# EAGLE board Qwiic LED Stick-Panel (EAGLE 9.0.1)
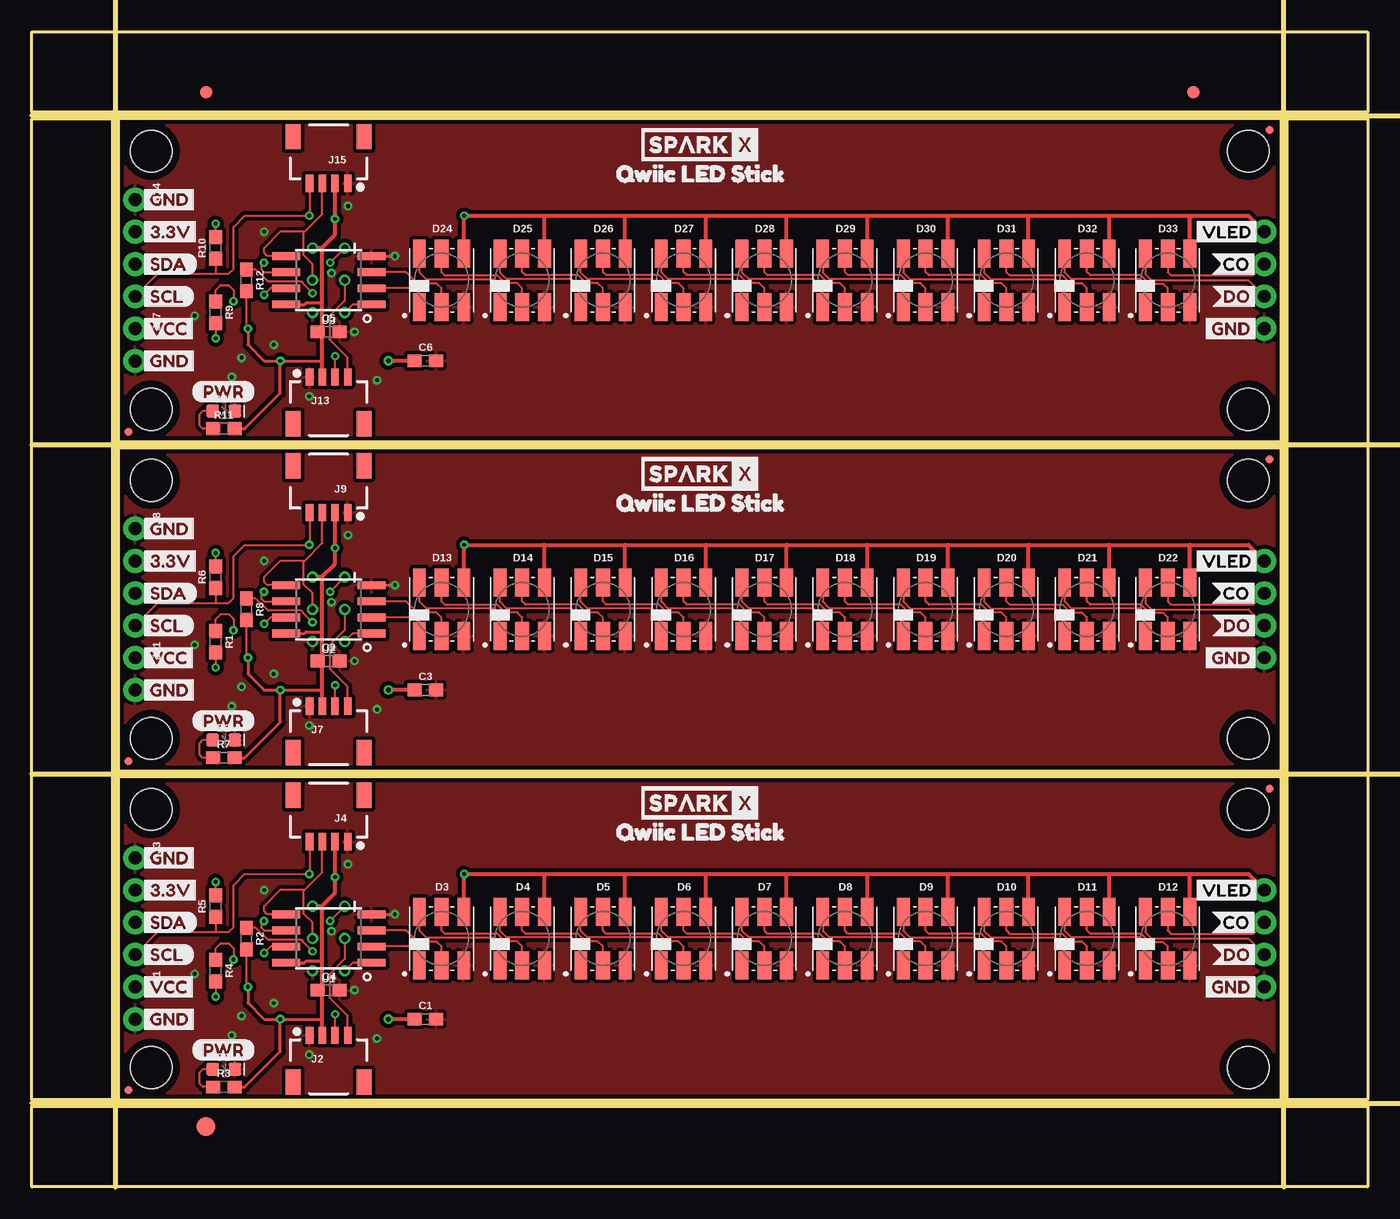
[diagram p0: board, top side]
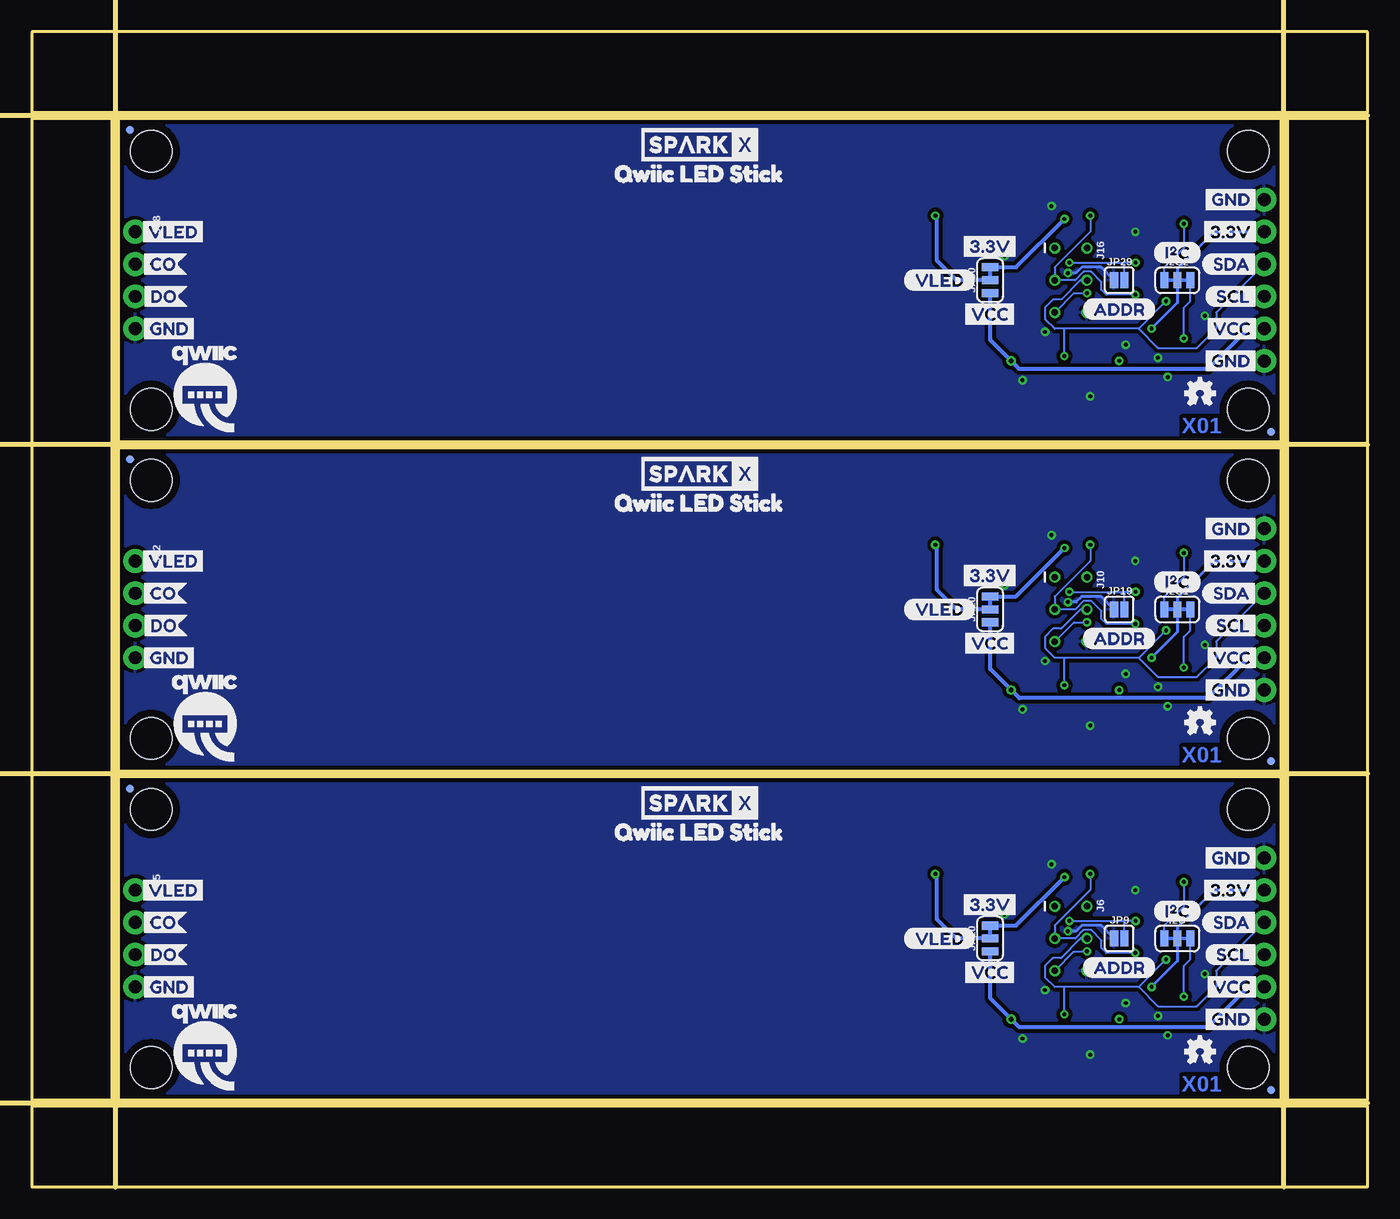
[diagram p1: board, bottom side, seen from below]

Size 105.16 x 90.93 mm. Coordinates in mm from the lower left corner, seen from the top.
Outline: 98.3,6.86 6.86,6.86 6.86,32.26 98.3,32.26 98.3,6.86
Outline: 98.3,32.77 6.86,32.77 6.86,58.17 98.3,58.17 98.3,32.77
Outline: 98.3,58.67 6.86,58.67 6.86,84.07 98.3,84.07 98.3,58.67
Outline: 0,6.35 105.16,6.35 105.16,0 0,0 0,6.35
Outline: 98.81,84.07 105.16,84.07 105.16,6.86 98.81,6.86 98.81,84.07
Outline: 0,90.93 105.16,90.93 105.16,84.58 0,84.58 0,90.93
Outline: 0,84.07 6.35,84.07 6.35,6.86 0,6.86 0,84.07
Copper layers (1*16): Top 0.035mm / dielectric 1.5mm / Bottom 0.035mm
Design rules "SparkFun-2-layer-PCBWay-LIMIT": minimum track width 6mil, minimum drill 0.3mm, track to track 6mil, track to pad 6mil, pad to pad 6mil, via to via 6mil, smd to smd 6mil, copper to edge 6mil, drill to drill 6mil, minimum pad ring 7mil, minimum via ring 7mil, stop-mask expansion 4mil, vias tented up to drill 25mil, thermal gap 10mil
Milling: 6 lines

## Footprints (pad centres in the part's own frame; a part is rotated, then mirrored left to right if it is on the bottom)
0603 = smd 1.1 x 1: 1 -0.85,0; 2 0.85,0
LED-0603 = smd 1 x 1: A -0.877,0; C 0.877,0
APA102-5050 = smd 1 x 2.2: P1 -1.75,-2.1; P3 1.75,-2.1; P4 1.75,2.1; P6 -1.75,2.1 | smd 1.1 x 2.2: P2 0,-2.1; P5 0,2.1
FIDUCIAL-1X2 = smd 1 x 1: 1 0,0
FIDUCIAL-1.5X3 = smd 1.5 x 1.5: 1 0,0
SMT-JUMPER_3_2-NC_TRACE_SILK = smd 0.635 x 1.27: 1 -1.016,0; 2 0,0; 3 1.016,0
1X02_NO_SILK = drill 1.016 pad 1.88: 1 0,0; 2 2.54,0
1X04_1MM_RA = smd 0.6 x 1.35: 1 -1.5,0; 2 -0.5,0; 3 0.5,0; 4 1.5,0 | smd 1.2 x 2: NC1 2.8,-3.675; NC2 -2.8,-3.675
1X04_NO_SILK = drill 1.016 pad 1.88: 1 0,0; 2 2.54,0; 3 5.08,0; 4 7.62,0
2X3_TEST_POINTS = drill 0.508: 1 -2.54,-1.27; 2 -2.54,1.27; 3 0,-1.27; 4 0,1.27; 5 2.54,-1.27; 6 2.54,1.27
MICRO-FIDUCIAL = smd 0.635 x 0.635: 1 0,0
STAND-OFF = hole 3.302: 0,0
SMT-JUMPER_2_NO_SILK = smd 0.635 x 1.27: 1 -0.406,0; 2 0.406,0
SMT-JUMPER_3_1-NC_TRACE_SILK = smd 0.635 x 1.27: 1 -1.016,0; 2 0,0; 3 1.016,0
SO08-EIAJ_MCU = smd 0.61 x 2.21: 1 -1.905,-3.378; 2 -0.635,-3.378; 3 0.635,-3.378; 4 1.905,-3.378; 5 1.905,3.353; 6 0.635,3.353; 7 -0.635,3.353; 8 -1.905,3.353

## Placement (x,y rotation side)
C1  4.7uF  [0603]  30.99,13.21 0 top
C2  0.1uF  [0603]  23.37,41.4 0 top
C3  4.7uF  [0603]  30.99,39.12 0 top
C4  0.1uF  [0603]  23.37,15.49 0 top
C5  0.1uF  [0603]  23.37,67.31 0 top
C6  4.7uF  [0603]  30.99,65.02 0 top
D1  RED  [LED-0603]  15.11,9.27 0 top
D2  RED  [LED-0603]  15.11,35.18 0 top
D3  APA1025050  [APA102-5050]  32.26,19.56 0 top
D4  APA1025050  [APA102-5050]  38.61,19.56 0 top
D5  APA1025050  [APA102-5050]  44.96,19.56 0 top
D6  APA1025050  [APA102-5050]  51.31,19.56 0 top
D7  APA1025050  [APA102-5050]  57.66,19.56 0 top
D8  APA1025050  [APA102-5050]  64.01,19.56 0 top
D9  APA1025050  [APA102-5050]  70.36,19.56 0 top
D10  APA1025050  [APA102-5050]  76.71,19.56 0 top
D11  APA1025050  [APA102-5050]  83.06,19.56 0 top
D12  APA1025050  [APA102-5050]  89.41,19.56 0 top
D13  APA1025050  [APA102-5050]  32.26,45.47 0 top
D14  APA1025050  [APA102-5050]  38.61,45.47 0 top
D15  APA1025050  [APA102-5050]  44.96,45.47 0 top
D16  APA1025050  [APA102-5050]  51.31,45.47 0 top
D17  APA1025050  [APA102-5050]  57.66,45.47 0 top
D18  APA1025050  [APA102-5050]  64.01,45.47 0 top
D19  APA1025050  [APA102-5050]  70.36,45.47 0 top
D20  APA1025050  [APA102-5050]  76.71,45.47 0 top
D21  APA1025050  [APA102-5050]  83.06,45.47 0 top
D22  APA1025050  [APA102-5050]  89.41,45.47 0 top
D23  RED  [LED-0603]  15.11,61.09 0 top
D24  APA1025050  [APA102-5050]  32.26,71.37 0 top
D25  APA1025050  [APA102-5050]  38.61,71.37 0 top
D26  APA1025050  [APA102-5050]  44.96,71.37 0 top
D27  APA1025050  [APA102-5050]  51.31,71.37 0 top
D28  APA1025050  [APA102-5050]  57.66,71.37 0 top
D29  APA1025050  [APA102-5050]  64.01,71.37 0 top
D30  APA1025050  [APA102-5050]  70.36,71.37 0 top
D31  APA1025050  [APA102-5050]  76.71,71.37 0 top
D32  APA1025050  [APA102-5050]  83.06,71.37 0 top
D33  APA1025050  [APA102-5050]  89.41,71.37 0 top
E$1  [FIDUCIAL-1X2]  13.72,86.17 0 top
E$2  [FIDUCIAL-1X2]  91.44,86.17 0 top
E$3  [FIDUCIAL-1.5X3]  13.72,4.76 0 top
I2C  [SMT-JUMPER_3_2-NC_TRACE_SILK]  14.99,19.56 0 bottom
I2C1  [SMT-JUMPER_3_2-NC_TRACE_SILK]  14.99,45.47 0 bottom
I2C2  [SMT-JUMPER_3_2-NC_TRACE_SILK]  14.99,71.37 0 bottom
J1  [1X02_NO_SILK]  8.13,15.75 270 top
J2  SMD  [1X04_1MM_RA]  23.37,11.94 0 top
J3  PTH  [1X04_NO_SILK]  8.13,25.91 270 top
J4  SMD  [1X04_1MM_RA]  23.37,27.18 180 top
J5  [1X04_NO_SILK]  97.03,23.37 270 bottom
J6  AVR_SPI_PROG_3X2TESTPOINTS  [2X3_TEST_POINTS]  23.37,19.56 270 bottom
J7  SMD  [1X04_1MM_RA]  23.37,37.85 0 top
J8  PTH  [1X04_NO_SILK]  8.13,51.82 270 top
J9  SMD  [1X04_1MM_RA]  23.37,53.09 180 top
J10  AVR_SPI_PROG_3X2TESTPOINTS  [2X3_TEST_POINTS]  23.37,45.47 270 bottom
J11  [1X02_NO_SILK]  8.13,41.66 270 top
J12  [1X04_NO_SILK]  97.03,49.28 270 bottom
J13  SMD  [1X04_1MM_RA]  23.37,63.75 0 top
J14  PTH  [1X04_NO_SILK]  8.13,77.72 270 top
J15  SMD  [1X04_1MM_RA]  23.37,78.99 180 top
J16  AVR_SPI_PROG_3X2TESTPOINTS  [2X3_TEST_POINTS]  23.37,71.37 270 bottom
J17  [1X02_NO_SILK]  8.13,67.56 270 top
J18  [1X04_NO_SILK]  97.03,75.18 270 bottom
JP1  FIDUCIALUFIDUCIAL  [MICRO-FIDUCIAL]  7.62,7.62 270 bottom
JP2  FIDUCIALUFIDUCIAL  [MICRO-FIDUCIAL]  97.41,31.37 90 top
JP3  STAND-OFF  [STAND-OFF]  9.4,9.4 90 top
JP4  STAND-OFF  [STAND-OFF]  9.4,29.72 90 top
JP5  FIDUCIALUFIDUCIAL  [MICRO-FIDUCIAL]  97.41,31.37 270 bottom
JP6  FIDUCIALUFIDUCIAL  [MICRO-FIDUCIAL]  7.62,7.62 90 top
JP7  STAND-OFF  [STAND-OFF]  95.76,29.72 0 top
JP8  STAND-OFF  [STAND-OFF]  95.76,9.4 0 top
JP9  JUMPER-SMT_2_NO_SILK  [SMT-JUMPER_2_NO_SILK]  19.56,19.56 0 bottom
JP10  [SMT-JUMPER_3_1-NC_TRACE_SILK]  29.72,19.56 90 bottom
JP11  STAND-OFF  [STAND-OFF]  9.4,35.31 90 top
JP12  STAND-OFF  [STAND-OFF]  9.4,55.63 90 top
JP13  FIDUCIALUFIDUCIAL  [MICRO-FIDUCIAL]  97.41,57.28 90 top
JP14  FIDUCIALUFIDUCIAL  [MICRO-FIDUCIAL]  7.62,33.53 90 top
JP15  FIDUCIALUFIDUCIAL  [MICRO-FIDUCIAL]  7.62,33.53 270 bottom
JP16  FIDUCIALUFIDUCIAL  [MICRO-FIDUCIAL]  97.41,57.28 270 bottom
JP17  STAND-OFF  [STAND-OFF]  95.76,55.63 0 top
JP18  STAND-OFF  [STAND-OFF]  95.76,35.31 0 top
JP19  JUMPER-SMT_2_NO_SILK  [SMT-JUMPER_2_NO_SILK]  19.56,45.47 0 bottom
JP20  [SMT-JUMPER_3_1-NC_TRACE_SILK]  29.72,45.47 90 bottom
JP21  STAND-OFF  [STAND-OFF]  9.4,61.21 90 top
JP22  STAND-OFF  [STAND-OFF]  9.4,81.53 90 top
JP23  FIDUCIALUFIDUCIAL  [MICRO-FIDUCIAL]  97.41,83.19 90 top
JP24  FIDUCIALUFIDUCIAL  [MICRO-FIDUCIAL]  7.62,59.44 90 top
JP25  FIDUCIALUFIDUCIAL  [MICRO-FIDUCIAL]  7.62,59.44 270 bottom
JP26  FIDUCIALUFIDUCIAL  [MICRO-FIDUCIAL]  97.41,83.19 270 bottom
JP27  STAND-OFF  [STAND-OFF]  95.76,81.53 0 top
JP28  STAND-OFF  [STAND-OFF]  95.76,61.21 0 top
JP29  JUMPER-SMT_2_NO_SILK  [SMT-JUMPER_2_NO_SILK]  19.56,71.37 0 bottom
JP30  [SMT-JUMPER_3_1-NC_TRACE_SILK]  29.72,71.37 90 bottom
LOGO1  OSHW-LOGOMINI  [OSHW-LOGO-MINI]  13.21,10.67 0 bottom
LOGO2  OSHW-LOGOMINI  [OSHW-LOGO-MINI]  13.21,36.58 0 bottom
LOGO3  OSHW-LOGOMINI  [OSHW-LOGO-MINI]  13.21,62.48 0 bottom
R1  2.2k  [0603]  14.48,42.93 270 top
R2  4.7k  [0603]  16.89,19.56 270 top
R3  1k  [0603]  15.11,7.87 0 top
R4  2.2k  [0603]  14.48,17.02 270 top
R5  2.2k  [0603]  14.48,22.1 90 top
R6  2.2k  [0603]  14.48,48.01 90 top
R7  1k  [0603]  15.11,33.78 0 top
R8  4.7k  [0603]  16.89,45.47 270 top
R9  2.2k  [0603]  14.48,68.83 270 top
R10  2.2k  [0603]  14.48,73.91 90 top
R11  1k  [0603]  15.11,59.69 0 top
R12  4.7k  [0603]  16.89,71.37 270 top
U1  Tiny85-20-SMT  [SO08-EIAJ_MCU]  23.37,19.56 90 top
U2  Tiny85-20-SMT  [SO08-EIAJ_MCU]  23.37,45.47 90 top
U3  Tiny85-20-SMT  [SO08-EIAJ_MCU]  23.37,71.37 90 top
U$1  SPARKX-LOGO4  [SPARKX-MEDIUM]  52.58,30.23 0 top
U$2  SPARKX-LOGO4  [SPARKX-MEDIUM]  52.58,30.23 0 bottom
U$3  [GND1]  13.21,25.91 0 bottom
U$4  [3#3V2]  13.34,23.37 0 bottom
U$5  [VLED4]  96.9,23.37 0 bottom
U$6  [DO8]  96.77,18.29 0 bottom
U$7  [CO5]  96.77,20.83 0 bottom
U$8  [GND1]  96.77,15.75 0 bottom
U$9  [VLED4]  91.19,23.37 0 top
U$10  [(PWR)]  12.57,10.79 0 top
U$11  [(I_SUPER2_C)]  16.89,21.72 0 bottom
U$12  [GND1]  91.95,15.75 0 top
U$13  [QWIIC_LED_STICK1]  60.45,27.94 0 bottom
U$14  SPARKX-LOGO4  [SPARKX-MEDIUM]  52.58,56.13 0 bottom
U$15  [DO12]  92.84,18.29 0 top
U$16  [CO9]  92.84,20.83 0 top
U$17  [SDA0]  13.08,20.83 0 bottom
U$18  [SCL1]  12.83,18.29 0 bottom
U$19  [VCC1]  8.38,15.75 0 top
U$20  [VCC1]  13.08,15.75 0 bottom
U$21  [3#3V2]  8.38,23.37 0 top
U$22  [GND1]  8.38,25.91 0 top
U$23  [GND0]  13.21,13.21 0 bottom
U$24  [GND0]  8.38,13.21 0 top
U$25  [VLED3]  36.58,19.56 0 bottom
U$26  [SCL9]  8.38,18.29 0 top
U$27  [SDA8]  8.38,20.83 0 top
U$28  [ADDR2]  22.48,17.27 0 bottom
U$29  [QWIIC-LOGO-MEDIUM]  91.57,11.05 0 bottom
U$30  [3#3V3]  32.26,22.23 0 bottom
U$31  [VCC1]  32.13,16.89 0 bottom
U$32  [QWIIC_LED_STICK1]  44.83,27.94 0 top
U$33  SPARKX-LOGO4  [SPARKX-MEDIUM]  52.58,56.13 0 top
U$34  [3#3V2]  8.38,49.28 0 top
U$35  [GND1]  8.38,51.82 0 top
U$36  [SCL9]  8.38,44.2 0 top
U$37  [SDA8]  8.38,46.74 0 top
U$38  [GND1]  13.21,51.82 0 bottom
U$39  [3#3V2]  13.34,49.28 0 bottom
U$40  [(PWR)]  12.57,36.7 0 top
U$41  [(I_SUPER2_C)]  16.89,47.62 0 bottom
U$42  [QWIIC-LOGO-MEDIUM]  91.57,36.96 0 bottom
U$43  [VLED4]  91.19,49.28 0 top
U$44  [GND1]  91.95,41.66 0 top
U$45  [DO12]  92.84,44.2 0 top
U$46  [CO9]  92.84,46.74 0 top
U$47  [SDA0]  13.08,46.74 0 bottom
U$48  [SCL1]  12.83,44.2 0 bottom
U$49  [VLED4]  96.9,49.28 0 bottom
U$50  [DO8]  96.77,44.2 0 bottom
U$51  [CO5]  96.77,46.74 0 bottom
U$52  [GND1]  96.77,41.66 0 bottom
U$53  [VCC1]  8.38,41.66 0 top
U$54  [VCC1]  13.08,41.66 0 bottom
U$55  [GND0]  13.21,39.12 0 bottom
U$56  [GND0]  8.38,39.12 0 top
U$57  [VLED3]  36.58,45.47 0 bottom
U$58  [ADDR2]  22.48,43.18 0 bottom
U$59  [3#3V3]  32.26,48.13 0 bottom
U$60  [VCC1]  32.13,42.8 0 bottom
U$61  [QWIIC_LED_STICK1]  44.83,53.85 0 top
U$62  [QWIIC_LED_STICK1]  60.45,53.85 0 bottom
U$63  SPARKX-LOGO4  [SPARKX-MEDIUM]  52.58,82.04 0 bottom
U$64  SPARKX-LOGO4  [SPARKX-MEDIUM]  52.58,82.04 0 top
U$65  [3#3V2]  8.38,75.18 0 top
U$66  [GND1]  8.38,77.72 0 top
U$67  [SCL9]  8.38,70.1 0 top
U$68  [SDA8]  8.38,72.64 0 top
U$69  [GND1]  13.21,77.72 0 bottom
U$70  [3#3V2]  13.34,75.18 0 bottom
U$71  [(PWR)]  12.57,62.61 0 top
U$72  [(I_SUPER2_C)]  16.89,73.53 0 bottom
U$73  [QWIIC-LOGO-MEDIUM]  91.57,62.86 0 bottom
U$74  [VLED4]  91.19,75.18 0 top
U$75  [GND1]  91.95,67.56 0 top
U$76  [DO12]  92.84,70.1 0 top
U$77  [CO9]  92.84,72.64 0 top
U$78  [SDA0]  13.08,72.64 0 bottom
U$79  [SCL1]  12.83,70.1 0 bottom
U$80  [VLED4]  96.9,75.18 0 bottom
U$81  [DO8]  96.77,70.1 0 bottom
U$82  [CO5]  96.77,72.64 0 bottom
U$83  [GND1]  96.77,67.56 0 bottom
U$84  [VCC1]  8.38,67.56 0 top
U$85  [VCC1]  13.08,67.56 0 bottom
U$86  [GND0]  13.21,65.02 0 bottom
U$87  [GND0]  8.38,65.02 0 top
U$88  [VLED3]  36.58,71.37 0 bottom
U$89  [ADDR2]  22.48,69.09 0 bottom
U$90  [3#3V3]  32.26,74.04 0 bottom
U$91  [VCC1]  32.13,68.71 0 bottom
U$92  [QWIIC_LED_STICK1]  44.83,79.76 0 top
U$93  [QWIIC_LED_STICK1]  60.45,79.76 0 bottom

## Library data of the parts
C1 C3 C6 = SparkFun-Capacitors; PROD_ID: CAP-08280
C2 C4 C5 = SparkFun-Capacitors; PROD_ID: CAP-00810
D1 D2 D23 = SparkFun-LED; PROD_ID: DIO-00819
D3-D22 D24-D33 = SparkFun-LED; PROD_ID: DIO-13739
E$1 E$2 LOGO1-LOGO3 = SparkFun-Aesthetics
E$3 = SparkFun-Retired
I2C I2C1 I2C2 JP9 JP10 JP19 JP20 JP29 JP30 = SparkFun-Jumpers
J1 J6 J10 J11 J16 J17 = SparkFun-Connectors
J2-J4 J7-J9 J13-J15 U$1 U$2 U$14 U$33 U$63 U$64 = SparkX
J5 J12 J18 = SparkFun-Connectors; PROD_ID: CONN-09696
JP1-JP8 JP11-JP18 JP21-JP28 = SparkFun
R1 R4-R6 R9 R10 = SparkFun-Resistors; PROD_ID: RES-08272
R2 R8 R12 = SparkFun-Resistors; PROD_ID: RES-07857
R3 R7 R11 = SparkFun-Resistors; PROD_ID: RES-07856
U1-U3 = Qwiic-Bluetooth-HC1x; PROD_ID: IC-09092
U$3 U$4 U$8 U$10-U$12 U$21 U$22 U$26 U$27 U$34-U$41 U$44 U$52 U$65-U$72 U$75 U$83 = Labels-0_04
U$5-U$7 U$9 U$15-U$18 U$25 U$28 U$43 U$45-U$51 U$57 U$58 U$74 U$76-U$82 U$88 U$89 = buzzard_labels (5)
U$13 U$32 U$61 U$62 U$92 U$93 = buzzard_labels (6)
U$19 U$20 U$23 U$24 U$30 U$31 U$53-U$56 U$59 U$60 U$84-U$87 U$90 U$91 = buzzard_power
U$29 U$42 U$73 = Labels

## Nets
3.3V: C4.1 I2C.2 J2.2 J3.2 J4.2 J6.2 JP10.3 R2.2 R3.2 U1.8
3.3V1: C2.1 I2C1.2 J7.2 J8.2 J9.2 J10.2 JP20.3 R7.2 R8.2 U2.8
3.3V2: C5.1 I2C2.2 J13.2 J14.2 J15.2 J16.2 JP30.3 R11.2 R12.2 U3.8
!RST: J6.5 R2.1 U1.1
!RST1: J10.5 R8.1 U2.1
!RST2: J16.5 R12.1 U3.1
ADDR(MISO): J6.1 JP9.2 U1.6
ADDR(MISO)1: J10.1 JP19.2 U2.6
ADDR(MISO)2: J16.1 JP29.2 U3.6
CLK: D3.P2 U1.3
CLK1: D13.P2 U2.3
CLK2: D24.P2 U3.3
CO(10): D12.P5 J5.2
CO(10)1: D22.P5 J12.2
CO(10)2: D33.P5 J18.2
DO: D3.P1 U1.2
DO1: D13.P1 U2.2
DO2: D24.P1 U3.2
DO(10): D12.P6 J5.3
DO(10)1: D22.P6 J12.3
DO(10)2: D33.P6 J18.3
GND: C1.2 C4.2 D1.C D3.P3 D4.P3 D5.P3 D6.P3 D7.P3 D8.P3 D9.P3 D10.P3 D11.P3 D12.P3 J1.2 J2.1 J3.1 J4.1 J5.4 J6.6 JP9.1 U1.4
GND1: C2.2 C3.2 D2.C D13.P3 D14.P3 D15.P3 D16.P3 D17.P3 D18.P3 D19.P3 D20.P3 D21.P3 D22.P3 J7.1 J8.1 J9.1 J10.6 J11.2 J12.4 JP19.1 U2.4
GND2: C5.2 C6.2 D23.C D24.P3 D25.P3 D26.P3 D27.P3 D28.P3 D29.P3 D30.P3 D31.P3 D32.P3 D33.P3 J13.1 J14.1 J15.1 J16.6 J17.2 J18.4 JP29.1 U3.4
N$1: I2C.1 R5.2
N$2: I2C.3 R4.2
N$3: D1.A R3.1
N$4: I2C1.1 R6.2
N$5: I2C1.3 R1.2
N$6: D2.A R7.1
N$7: D21.P6 D22.P1
N$8: D11.P6 D12.P1
N$9: D11.P5 D12.P2
N$10: D10.P5 D11.P2
N$11: D10.P6 D11.P1
N$12: D9.P5 D10.P2
N$13: D9.P6 D10.P1
N$14: D8.P5 D9.P2
N$15: D8.P6 D9.P1
N$16: D7.P5 D8.P2
N$17: D7.P6 D8.P1
N$18: D6.P5 D7.P2
N$19: D6.P6 D7.P1
N$20: D5.P6 D6.P1
N$21: D5.P5 D6.P2
N$22: D4.P6 D5.P1
N$23: D4.P5 D5.P2
N$24: D3.P5 D4.P2
N$25: D3.P6 D4.P1
N$26: D21.P5 D22.P2
N$27: D20.P5 D21.P2
N$28: D20.P6 D21.P1
N$29: D19.P5 D20.P2
N$30: D19.P6 D20.P1
N$31: D18.P5 D19.P2
N$32: D18.P6 D19.P1
N$33: D17.P5 D18.P2
N$34: D17.P6 D18.P1
N$35: D16.P5 D17.P2
N$36: D16.P6 D17.P1
N$37: D15.P6 D16.P1
N$38: D15.P5 D16.P2
N$39: D14.P6 D15.P1
N$40: D14.P5 D15.P2
N$41: D13.P5 D14.P2
N$42: D13.P6 D14.P1
N$43: I2C2.1 R10.2
N$44: I2C2.3 R9.2
N$45: D23.A R11.1
N$46: D32.P6 D33.P1
N$47: D32.P5 D33.P2
N$48: D31.P5 D32.P2
N$49: D31.P6 D32.P1
N$50: D30.P5 D31.P2
N$51: D30.P6 D31.P1
N$52: D29.P5 D30.P2
N$53: D29.P6 D30.P1
N$54: D28.P5 D29.P2
N$55: D28.P6 D29.P1
N$56: D27.P5 D28.P2
N$57: D27.P6 D28.P1
N$58: D26.P6 D27.P1
N$59: D26.P5 D27.P2
N$60: D25.P6 D26.P1
N$61: D25.P5 D26.P2
N$62: D24.P5 D25.P2
N$63: D24.P6 D25.P1
SCL: J2.4 J3.4 J4.4 J6.3 R5.1 U1.7
SCL1: J7.4 J8.4 J9.4 J10.3 R6.1 U2.7
SCL2: J13.4 J14.4 J15.4 J16.3 R10.1 U3.7
SDA: J2.3 J3.3 J4.3 J6.4 R4.1 U1.5
SDA1: J7.3 J8.3 J9.3 J10.4 R1.1 U2.5
SDA2: J13.3 J14.3 J15.3 J16.4 R9.1 U3.5
VCC: C1.1 J1.1 JP10.1
VCC1: C3.1 J11.1 JP20.1
VCC2: C6.1 J17.1 JP30.1
VLED: D3.P4 D4.P4 D5.P4 D6.P4 D7.P4 D8.P4 D9.P4 D10.P4 D11.P4 D12.P4 J5.1 JP10.2
VLED1: D13.P4 D14.P4 D15.P4 D16.P4 D17.P4 D18.P4 D19.P4 D20.P4 D21.P4 D22.P4 J12.1 JP20.2
VLED2: D24.P4 D25.P4 D26.P4 D27.P4 D28.P4 D29.P4 D30.P4 D31.P4 D32.P4 D33.P4 J18.1 JP30.2

## Tracks (layer width: path | path; a pad name or v marks a point on that pad's centre or on a via)
3.3V  (via drill 0.3)
  Top 0.152: R2.2 16.89,15.88 v17.02,15.75
  Top 0.254: J2.2 22.87,13.21 | 22.87,13.21 22.87,15.14 C4.1 22.86,15.84 22.86,17.78 21.59,17.78 21.46,17.65 U1.8 | v17.02,15.75 17.02,14.48 18.29,13.21 v19.56,13.21 | v19.56,13.21 22.87,13.21 | v19.56,13.21 19.56,10.67 16.76,7.87 R3.2
  Top 0.305: J4.2 v23.87,24.38 23.87,23.13 22.84,22.1 | J2.2 22.84,11.97 22.84,22.1 | 22.61,22.1 J6.2 22.84,22.1
  Bottom 0.152: 12.06,23.37 11.18,23.37
  Bottom 0.254: 11.56,23.37 11.18,23.37 J3.2 12.06,23.37 14.96,20.47 14.96,19.58 I2C.2 14.99,17.78 v17.02,15.75
  Bottom 0.305: JP10.3 27.68,20.57 v23.87,24.38
3.3V1  (via drill 0.3)
  Top 0.152: R8.2 16.89,41.78 v17.02,41.66
  Top 0.254: J7.2 22.87,39.12 | 22.87,39.12 22.87,41.05 C2.1 22.86,41.74 22.86,43.69 21.59,43.69 21.46,43.56 U2.8 | v17.02,41.66 17.02,40.39 18.29,39.12 v19.56,39.12 | v19.56,39.12 22.87,39.12 | v19.56,39.12 19.56,36.58 16.76,33.78 R7.2
  Top 0.305: J9.2 v23.87,50.29 23.87,49.04 22.84,48.01 | J7.2 22.84,37.88 22.84,48.01 | 22.61,48.01 J10.2 22.84,48.01
  Bottom 0.152: 12.06,49.28 11.18,49.28
  Bottom 0.254: 11.56,49.28 11.18,49.28 J8.2 12.06,49.28 14.96,46.38 14.96,45.49 I2C1.2 14.99,43.69 v17.02,41.66
  Bottom 0.305: JP20.3 27.68,46.48 v23.87,50.29
3.3V2  (via drill 0.3)
  Top 0.152: R12.2 16.89,67.69 v17.02,67.56
  Top 0.254: J13.2 22.87,65.02 | 22.87,65.02 22.87,66.96 C5.1 22.86,67.65 22.86,69.6 21.59,69.6 21.46,69.47 U3.8 | v17.02,67.56 17.02,66.29 18.29,65.02 v19.56,65.02 | v19.56,65.02 22.87,65.02 | v19.56,65.02 19.56,62.48 16.76,59.69 R11.2
  Top 0.305: J15.2 v23.87,76.2 23.87,74.95 22.84,73.91 | J13.2 22.84,63.79 22.84,73.91 | 22.61,73.91 J16.2 22.84,73.91
  Bottom 0.152: 12.06,75.18 11.18,75.18
  Bottom 0.254: 11.56,75.18 11.18,75.18 J14.2 12.06,75.18 14.96,72.29 14.96,71.4 I2C2.2 14.99,69.6 v17.02,67.56
  Bottom 0.305: JP30.3 27.68,72.39 v23.87,76.2
!RST  (via drill 0.3)
  Top 0.152: U1.1 25.27,17.65 J6.5 | R2.1 17.64,20.41 18.59,19.46 21.21,19.46 21.35,19.32 21.35,19.29 v22.1,18.54
  Bottom 0.152: J6.5 23.11,18.54 v22.1,18.54
!RST1  (via drill 0.3)
  Top 0.152: U2.1 25.27,43.56 J10.5 | R8.1 17.64,46.32 18.59,45.36 21.21,45.36 21.35,45.23 21.35,45.2 v22.1,44.45
  Bottom 0.152: J10.5 23.11,44.45 v22.1,44.45
!RST2  (via drill 0.3)
  Top 0.152: U3.1 25.27,69.47 J16.5 | R12.1 17.64,72.22 18.59,71.27 21.21,71.27 21.35,71.14 21.35,71.11 v22.1,70.36
  Bottom 0.152: J16.5 23.11,70.36 v22.1,70.36
ADDR(MISO)  (via drill 0.3)
  Top 0.152: U1.6 18.29,20.19 18.1,20.38 18.1,20.76 v18.27,20.94 | J6.1 v23.48,20.94
  Bottom 0.152: v23.48,20.94 19.18,20.94 | JP9.2 19.15,20.91 19.18,20.94 | v18.27,20.94 19.18,20.94
ADDR(MISO)1  (via drill 0.3)
  Top 0.152: U2.6 18.29,46.1 18.1,46.29 18.1,46.67 v18.27,46.85 | J10.1 v23.48,46.85
  Bottom 0.152: v23.48,46.85 19.18,46.85 | JP19.2 19.15,46.82 19.18,46.85 | v18.27,46.85 19.18,46.85
ADDR(MISO)2  (via drill 0.3)
  Top 0.152: U3.6 18.29,72.01 18.1,72.2 18.1,72.58 v18.27,72.76 | J16.1 v23.48,72.76
  Bottom 0.152: v23.48,72.76 19.18,72.76 | JP29.2 19.15,72.73 19.18,72.76 | v18.27,72.76 19.18,72.76
CLK
  Top 0.152: 30.35,19.3 31.88,19.3 32.26,18.92 D3.P2 | 30.35,19.3 | 30.35,19.3 29.46,20.19 U1.3
CLK1
  Top 0.152: 30.35,45.21 31.88,45.21 32.26,44.83 D13.P2 | 30.35,45.21 | 30.35,45.21 29.46,46.1 U2.3
CLK2
  Top 0.152: 30.35,71.12 31.88,71.12 32.26,70.74 D24.P2 | 30.35,71.12 | 30.35,71.12 29.46,72.01 U3.3
CO(10)
  Top 0.152: D12.P5 89.41,20.19 89.66,19.94 96.14,19.94 J5.2
CO(10)1
  Top 0.152: D22.P5 89.41,46.1 89.66,45.85 96.14,45.85 J12.2
CO(10)2
  Top 0.152: D33.P5 89.41,72.01 89.66,71.76 96.14,71.76 J18.2
DO
  Top 0.152: D3.P1 30.51,18.77 30.35,18.92 U1.2
DO1
  Top 0.152: D13.P1 30.51,44.68 30.35,44.83 U2.2
DO2
  Top 0.152: D24.P1 30.51,70.58 30.35,70.74 U3.2
DO(10)
  Top 0.152: D12.P6 87.66,20.04 88.14,19.56 95.76,19.56 J5.3
DO(10)1
  Top 0.152: D22.P6 87.66,45.95 88.14,45.47 95.76,45.47 J12.3
DO(10)2
  Top 0.152: D33.P6 87.66,71.85 88.14,71.37 95.76,71.37 J18.3
GND  (via drill 0.3)
  Top 0.254: U1.4 v28.57,21.46
  Bottom 0.254: v23.6,20.13 22.96,20.13 22.52,20.57 20.98,20.57 JP9.1
  other vias: 24.89,25.4 15.75,11.94 19.05,14.48 18.29,23.37 16.51,13.46 25.4,15.49 21.84,10.41 12.83,16.76 27.18,11.68
  pour Bottom (isolate 0.305): 98.3,6.86 6.86,6.86 6.86,32.26 98.3,32.26
  pour Top (isolate 0.305): 98.3,6.86 6.86,6.86 6.86,32.26 98.3,32.26
GND1  (via drill 0.3)
  Top 0.254: U2.4 v28.57,47.37
  Bottom 0.254: v23.6,46.04 22.96,46.04 22.52,46.48 20.98,46.48 JP19.1
  other vias: 24.89,51.31 15.75,37.85 19.05,40.39 18.29,49.28 16.51,39.37 25.4,41.4 21.84,36.32 12.83,42.67 27.18,37.59
  pour Bottom (isolate 0.305): 98.3,32.77 6.86,32.77 6.86,58.17 98.3,58.17
  pour Top (isolate 0.305): 98.3,32.77 6.86,32.77 6.86,58.17 98.3,58.17
GND2  (via drill 0.3)
  Top 0.254: U3.4 v28.57,73.28
  Bottom 0.254: v23.6,71.94 22.96,71.94 22.52,72.39 20.98,72.39 JP29.1
  other vias: 24.89,77.22 15.75,63.75 19.05,66.29 18.29,75.18 16.51,65.28 25.4,67.31 21.84,62.23 12.83,68.58 27.18,63.5
  pour Bottom (isolate 0.305): 98.3,58.67 6.86,58.67 6.86,84.07 98.3,84.07
  pour Top (isolate 0.305): 98.3,58.67 6.86,58.67 6.86,84.07 98.3,84.07
N$1  (via drill 0.3)
  Top 0.152: R5.2 v14.48,24
  Bottom 0.152: v14.48,24 14.48,22.1 16,20.57 I2C.1
N$2  (via drill 0.3)
  Top 0.152: R4.2 v14.48,14.99
  Bottom 0.152: v14.48,14.99 14.48,17.4 13.97,17.91 I2C.3
N$3
  Top 0.152: D1.A 13.46,9.27 13.21,9.02 13.21,8.13 13.46,7.87 R3.1
N$4  (via drill 0.3)
  Top 0.152: R6.2 v14.48,49.91
  Bottom 0.152: v14.48,49.91 14.48,48.01 16,46.48 I2C1.1
N$5  (via drill 0.3)
  Top 0.152: R1.2 v14.48,40.89
  Bottom 0.152: v14.48,40.89 14.48,43.31 13.97,43.81 I2C1.3
N$6
  Top 0.152: D2.A 13.46,35.18 13.21,34.92 13.21,34.04 13.46,33.78 R7.1
N$7
  Top 0.152: 81.28,47.54 D21.P6 81.31,46.07 81.84,45.54 87.2,45.54 87.66,45.08 D22.P1
N$8
  Top 0.152: 81.28,21.63 D11.P6 81.31,20.16 81.84,19.63 87.2,19.63 87.66,19.18 D12.P1
N$9
  Top 0.152: D11.P5 83.06,20.19 83.31,19.94 87.35,19.94 87.35,19.91 88.01,19.25 89.08,19.25 89.41,18.92 D12.P2
N$10
  Top 0.152: D10.P5 76.71,20.19 76.96,19.94 81.1,19.94 81.71,19.33 82.65,19.33 83.06,18.92 D11.P2
N$11
  Top 0.152: D10.P6 74.96,20.16 75.49,19.63 80.57,19.63 81.28,18.92 81.28,17.49 D11.P1
N$12
  Top 0.152: D9.P5 70.36,20.19 70.61,19.94 74.75,19.94 75.36,19.33 76.3,19.33 76.71,18.92 D10.P2
N$13
  Top 0.152: D9.P6 68.61,20.16 69.14,19.63 74.22,19.63 74.96,18.89 D10.P1 74.96,18.01 74.93,18.03
N$14
  Top 0.152: D8.P5 64.01,20.19 64.26,19.94 68.4,19.94 69.01,19.33 69.95,19.33 70.36,18.92 D9.P2
N$15
  Top 0.152: D8.P6 62.26,20.16 62.79,19.63 67.87,19.63 68.61,18.89 D9.P1
N$16
  Top 0.152: D7.P5 57.66,20.19 57.91,19.94 62.05,19.94 62.66,19.33 63.6,19.33 64.01,18.92 D8.P2
N$17
  Top 0.152: D7.P6 55.91,20.16 56.44,19.63 61.52,19.63 62.26,18.89 D8.P1
N$18
  Top 0.152: D6.P5 51.31,20.19 51.56,19.94 55.7,19.94 56.31,19.33 57.25,19.33 57.66,18.92 D7.P2
N$19
  Top 0.152: D6.P6 49.56,20.16 50.09,19.63 55.17,19.63 55.88,18.92 55.88,18.32 55.91,18.29 D7.P1
N$20
  Top 0.152: D5.P6 43.21,20.16 43.74,19.63 48.82,19.63 49.56,18.89 D6.P1
N$21
  Top 0.152: D5.P5 44.96,20.19 45.21,19.94 49.35,19.94 49.96,19.33 50.9,19.33 51.31,18.92 D6.P2
N$22
  Top 0.152: D4.P6 36.86,20.16 37.39,19.63 42.47,19.63 43.21,18.89 D5.P1
N$23
  Top 0.152: D4.P5 38.61,20.19 38.86,19.94 43,19.94 43.61,19.33 44.55,19.33 44.96,18.92 D5.P2
N$24
  Top 0.152: D3.P5 32.26,20.19 32.54,19.91 36.68,19.91 37.26,19.33 38.2,19.33 38.61,18.92 D4.P2
N$25
  Top 0.152: D3.P6 30.51,20.16 31.06,19.61 36.4,19.61 36.83,19.18 36.83,18.32 36.86,18.29 D4.P1
N$26
  Top 0.152: D21.P5 83.06,46.1 83.31,45.85 87.35,45.85 87.35,45.82 88.01,45.16 89.08,45.16 89.41,44.83 D22.P2
N$27
  Top 0.152: D20.P5 76.71,46.1 76.96,45.85 81.1,45.85 81.71,45.24 82.65,45.24 83.06,44.83 D21.P2
N$28
  Top 0.152: D20.P6 74.96,46.07 75.49,45.54 80.57,45.54 81.28,44.83 81.28,43.39 D21.P1
N$29
  Top 0.152: D19.P5 70.36,46.1 70.61,45.85 74.75,45.85 75.36,45.24 76.3,45.24 76.71,44.83 D20.P2
N$30
  Top 0.152: D19.P6 68.61,46.07 69.14,45.54 74.22,45.54 74.96,44.8 D20.P1 74.96,43.91 74.93,43.94
N$31
  Top 0.152: D18.P5 64.01,46.1 64.26,45.85 68.4,45.85 69.01,45.24 69.95,45.24 70.36,44.83 D19.P2
N$32
  Top 0.152: D18.P6 62.26,46.07 62.79,45.54 67.87,45.54 68.61,44.8 D19.P1
N$33
  Top 0.152: D17.P5 57.66,46.1 57.91,45.85 62.05,45.85 62.66,45.24 63.6,45.24 64.01,44.83 D18.P2
N$34
  Top 0.152: D17.P6 55.91,46.07 56.44,45.54 61.52,45.54 62.26,44.8 D18.P1
N$35
  Top 0.152: D16.P5 51.31,46.1 51.56,45.85 55.7,45.85 56.31,45.24 57.25,45.24 57.66,44.83 D17.P2
N$36
  Top 0.152: D16.P6 49.56,46.07 50.09,45.54 55.17,45.54 55.88,44.83 55.88,44.22 55.91,44.2 D17.P1
N$37
  Top 0.152: D15.P6 43.21,46.07 43.74,45.54 48.82,45.54 49.56,44.8 D16.P1
N$38
  Top 0.152: D15.P5 44.96,46.1 45.21,45.85 49.35,45.85 49.96,45.24 50.9,45.24 51.31,44.83 D16.P2
N$39
  Top 0.152: D14.P6 36.86,46.07 37.39,45.54 42.47,45.54 43.21,44.8 D15.P1
N$40
  Top 0.152: D14.P5 38.61,46.1 38.86,45.85 43,45.85 43.61,45.24 44.55,45.24 44.96,44.83 D15.P2
N$41
  Top 0.152: D13.P5 32.26,46.1 32.54,45.82 36.68,45.82 37.26,45.24 38.2,45.24 38.61,44.83 D14.P2
N$42
  Top 0.152: D13.P6 30.51,46.07 31.06,45.52 36.4,45.52 36.83,45.08 36.83,44.22 36.86,44.2 D14.P1
N$43  (via drill 0.3)
  Top 0.152: R10.2 v14.48,75.82
  Bottom 0.152: v14.48,75.82 14.48,73.91 16,72.39 I2C2.1
N$44  (via drill 0.3)
  Top 0.152: R9.2 v14.48,66.8
  Bottom 0.152: v14.48,66.8 14.48,69.22 13.97,69.72 I2C2.3
N$45
  Top 0.152: D23.A 13.46,61.09 13.21,60.83 13.21,59.94 13.46,59.69 R11.1
N$46
  Top 0.152: 81.28,73.45 D32.P6 81.31,71.98 81.84,71.45 87.2,71.45 87.66,70.99 D33.P1
N$47
  Top 0.152: D32.P5 83.06,72.01 83.31,71.76 87.35,71.76 87.35,71.73 88.01,71.07 89.08,71.07 89.41,70.74 D33.P2
N$48
  Top 0.152: D31.P5 76.71,72.01 76.96,71.76 81.1,71.76 81.71,71.15 82.65,71.15 83.06,70.74 D32.P2
N$49
  Top 0.152: D31.P6 74.96,71.98 75.49,71.45 80.57,71.45 81.28,70.74 81.28,69.3 D32.P1
N$50
  Top 0.152: D30.P5 70.36,72.01 70.61,71.76 74.75,71.76 75.36,71.15 76.3,71.15 76.71,70.74 D31.P2
N$51
  Top 0.152: D30.P6 68.61,71.98 69.14,71.45 74.22,71.45 74.96,70.71 D31.P1 74.96,69.82 74.93,69.85
N$52
  Top 0.152: D29.P5 64.01,72.01 64.26,71.76 68.4,71.76 69.01,71.15 69.95,71.15 70.36,70.74 D30.P2
N$53
  Top 0.152: D29.P6 62.26,71.98 62.79,71.45 67.87,71.45 68.61,70.71 D30.P1
N$54
  Top 0.152: D28.P5 57.66,72.01 57.91,71.76 62.05,71.76 62.66,71.15 63.6,71.15 64.01,70.74 D29.P2
N$55
  Top 0.152: D28.P6 55.91,71.98 56.44,71.45 61.52,71.45 62.26,70.71 D29.P1
N$56
  Top 0.152: D27.P5 51.31,72.01 51.56,71.76 55.7,71.76 56.31,71.15 57.25,71.15 57.66,70.74 D28.P2
N$57
  Top 0.152: D27.P6 49.56,71.98 50.09,71.45 55.17,71.45 55.88,70.74 55.88,70.13 55.91,70.1 D28.P1
N$58
  Top 0.152: D26.P6 43.21,71.98 43.74,71.45 48.82,71.45 49.56,70.71 D27.P1
N$59
  Top 0.152: D26.P5 44.96,72.01 45.21,71.76 49.35,71.76 49.96,71.15 50.9,71.15 51.31,70.74 D27.P2
N$60
  Top 0.152: D25.P6 36.86,71.98 37.39,71.45 42.47,71.45 43.21,70.71 D26.P1
N$61
  Top 0.152: D25.P5 38.61,72.01 38.86,71.76 43,71.76 43.61,71.15 44.55,71.15 44.96,70.74 D26.P2
N$62
  Top 0.152: D24.P5 32.26,72.01 32.54,71.73 36.68,71.73 37.26,71.15 38.2,71.15 38.61,70.74 D25.P2
N$63
  Top 0.152: D24.P6 30.51,71.98 31.06,71.42 36.4,71.42 36.83,70.99 36.83,70.13 36.86,70.1 D25.P1
SCL  (via drill 0.3)
  Top 0.152: J4.4 21.87,24.66 v21.84,24.64 16.76,24.64 15.88,23.75 15.88,20.45 15.49,20.07 14.48,20.07 | J6.3 24.64,17.95 23.44,16.75 23.44,14.9 24.87,13.47 J2.4 | U1.7 18.8,18.92 v18.29,18.41 | R5.1 14.48,20.07 | J3.4 9.91,20.07 14.48,20.07
  Bottom 0.152: v21.84,24.64 21.84,23.37 24.64,20.57 J6.3 23.03,19.56 22.37,20.22 21.77,20.22 20.97,19.42 | 20.95,19.41 20.97,19.42 | v18.29,18.41 20.57,18.41 20.97,18.81 20.97,19.42
SCL1  (via drill 0.3)
  Top 0.152: J9.4 21.87,50.57 v21.84,50.55 16.76,50.55 15.88,49.66 15.88,46.35 15.49,45.97 14.48,45.97 | J10.3 24.64,43.86 23.44,42.66 23.44,40.81 24.87,39.38 J7.4 | U2.7 18.8,44.83 v18.29,44.32 | R6.1 14.48,45.97 | J8.4 9.91,45.97 14.48,45.97
  Bottom 0.152: v21.84,50.55 21.84,49.28 24.64,46.48 J10.3 23.03,45.47 22.37,46.13 21.77,46.13 20.97,45.33 | 20.95,45.31 20.97,45.33 | v18.29,44.32 20.57,44.32 20.97,44.72 20.97,45.33
SCL2  (via drill 0.3)
  Top 0.152: J15.4 21.87,76.48 v21.84,76.45 16.76,76.45 15.88,75.56 15.88,72.26 15.49,71.88 14.48,71.88 | J16.3 24.64,69.77 23.44,68.57 23.44,66.72 24.87,65.29 J13.4 | U3.7 18.8,70.74 v18.29,70.23 | R10.1 14.48,71.88 | J14.4 9.91,71.88 14.48,71.88
  Bottom 0.152: v21.84,76.45 21.84,75.18 24.64,72.39 J16.3 23.03,71.37 22.37,72.03 21.77,72.03 20.97,71.23 | 20.95,71.22 20.97,71.23 | v18.29,70.23 20.57,70.23 20.97,70.62 20.97,71.23
SDA  (via drill 0.3)
  Top 0.152: U1.5 18.54,21.46 18.29,21.72 18.29,22.1 19.56,23.37 21.41,23.37 | J4.3 22.87,24.77 21.46,23.37 21.41,23.37 | J2.3 v23.87,13.58 v23.88,13.59 | R4.1 14.48,18.79 14.86,19.17 14.86,19.18 15.49,19.18 15.88,18.8 v15.88,17.91 | J6.4 22.1,20.83 21.41,21.51 21.41,23.37
  Bottom 0.152: 18.03,15.75 v15.88,17.91 | 18.03,15.75 16.51,14.22 13.46,14.22 11.94,15.75 11.94,17.02 J3.3 | J6.4 22.6,19.56 24.12,18.03 24.77,18.03 25.4,17.4 25.4,16.51 24.64,15.75 23.88,15.75 | 18.03,15.75 23.88,15.75 | v23.88,13.59 23.88,15.75
SDA1  (via drill 0.3)
  Top 0.152: U2.5 18.54,47.37 18.29,47.62 18.29,48.01 19.56,49.28 21.41,49.28 | J9.3 22.87,50.68 21.46,49.28 21.41,49.28 | J7.3 v23.87,39.49 v23.88,39.5 | R1.1 14.48,44.7 14.86,45.08 15.49,45.08 15.88,44.7 v15.88,43.81 | J10.4 22.1,46.74 21.41,47.42 21.41,49.28
  Bottom 0.152: 18.03,41.66 v15.88,43.81 | 18.03,41.66 16.51,40.13 13.46,40.13 11.94,41.66 11.94,42.93 J8.3 | J10.4 22.6,45.47 24.12,43.94 24.77,43.94 25.4,43.31 25.4,42.42 24.64,41.66 23.88,41.66 | 18.03,41.66 23.88,41.66 | v23.88,39.5 23.88,41.66
SDA2  (via drill 0.3)
  Top 0.152: U3.5 18.54,73.28 18.29,73.53 18.29,73.91 19.56,75.18 21.41,75.18 | J15.3 22.87,76.59 21.46,75.18 21.41,75.18 | J13.3 v23.87,65.4 v23.88,65.41 | R9.1 14.48,70.6 14.86,70.98 14.86,70.99 15.49,70.99 15.88,70.61 v15.88,69.72 | J16.4 22.1,72.64 21.41,73.33 21.41,75.18
  Bottom 0.152: 18.03,67.56 v15.88,69.72 | 18.03,67.56 16.51,66.04 13.46,66.04 11.94,67.56 11.94,68.83 J14.3 | J16.4 22.6,71.37 24.12,69.85 24.77,69.85 25.4,69.22 25.4,68.33 24.64,67.56 23.88,67.56 | 18.03,67.56 23.88,67.56 | v23.88,65.41 23.88,67.56
VCC  (via drill 0.38)
  Top 0.305: C1.1 v28.07,13.21
  Bottom 0.305: J1.1 9.4,15.75 12.57,12.57 27.43,12.57 v28.07,13.21 29.72,14.86 JP10.1
VCC1  (via drill 0.38)
  Top 0.305: C3.1 v28.07,39.12
  Bottom 0.305: J11.1 9.4,41.66 12.57,38.48 27.43,38.48 v28.07,39.12 29.72,40.77 JP20.1
VCC2  (via drill 0.38)
  Top 0.305: C6.1 v28.07,65.02
  Bottom 0.305: J17.1 9.4,67.56 12.57,64.39 27.43,64.39 v28.07,65.02 29.72,66.67 JP30.1
VLED  (via drill 0.3)
  Top 0.152: D9.P4 72.14,21.69 | D10.P4 78.49,21.69 | D8.P4 65.79,21.69 | D7.P4 59.44,21.69
  Top 0.305: D3.P4 34.01,24.61 v34.04,24.64 40.36,24.64 | 40.36,24.64 46.71,24.64 | 46.71,24.64 53.06,24.64 | 53.06,24.64 59.41,24.64 | 59.41,24.64 65.76,24.64 | 65.76,24.64 72.11,24.64 | 72.11,24.64 78.46,24.64 | 78.46,24.64 84.81,24.64 | D11.P4 84.81,24.64 | D10.P4 78.46,24.64 | D9.P4 72.11,24.64 | D8.P4 65.76,24.64 | D7.P4 59.41,24.64 | D6.P4 53.06,24.64 | D5.P4 46.71,24.64 | D4.P4 40.36,24.64 | 84.81,24.64 91.16,24.64 | D12.P4 91.16,24.64 | J5.1 95.76,24.64 91.16,24.64
  Bottom 0.305: JP10.2 32.38,19.56 33.91,21.08 33.91,24.51 v34.04,24.64
VLED1  (via drill 0.3)
  Top 0.152: D19.P4 72.14,47.59 | D20.P4 78.49,47.59 | D18.P4 65.79,47.59 | D17.P4 59.44,47.59
  Top 0.305: D13.P4 34.01,50.52 v34.04,50.55 40.36,50.55 | 40.36,50.55 46.71,50.55 | 46.71,50.55 53.06,50.55 | 53.06,50.55 59.41,50.55 | 59.41,50.55 65.76,50.55 | 65.76,50.55 72.11,50.55 | 72.11,50.55 78.46,50.55 | 78.46,50.55 84.81,50.55 | D21.P4 84.81,50.55 | D20.P4 78.46,50.55 | D19.P4 72.11,50.55 | D18.P4 65.76,50.55 | D17.P4 59.41,50.55 | D16.P4 53.06,50.55 | D15.P4 46.71,50.55 | D14.P4 40.36,50.55 | 84.81,50.55 91.16,50.55 | D22.P4 91.16,50.55 | J12.1 95.76,50.55 91.16,50.55
  Bottom 0.305: JP20.2 32.38,45.47 33.91,46.99 33.91,50.42 v34.04,50.55
VLED2  (via drill 0.3)
  Top 0.152: D30.P4 72.14,73.5 | D31.P4 78.49,73.5 | D29.P4 65.79,73.5 | D28.P4 59.44,73.5
  Top 0.305: D24.P4 34.01,76.43 v34.04,76.45 40.36,76.45 | 40.36,76.45 46.71,76.45 | 46.71,76.45 53.06,76.45 | 53.06,76.45 59.41,76.45 | 59.41,76.45 65.76,76.45 | 65.76,76.45 72.11,76.45 | 72.11,76.45 78.46,76.45 | 78.46,76.45 84.81,76.45 | D32.P4 84.81,76.45 | D31.P4 78.46,76.45 | D30.P4 72.11,76.45 | D29.P4 65.76,76.45 | D28.P4 59.41,76.45 | D27.P4 53.06,76.45 | D26.P4 46.71,76.45 | D25.P4 40.36,76.45 | 84.81,76.45 91.16,76.45 | D33.P4 91.16,76.45 | J18.1 95.76,76.45 91.16,76.45
  Bottom 0.305: JP30.2 32.38,71.37 33.91,72.9 33.91,76.33 v34.04,76.45

## Text on the board
Bottom: X01 | X01 | X01
Milling: v-score | v-score | v-score | v-score | v-score | v-score